# EAGLE board acoustics (EAGLE 9.1.3)
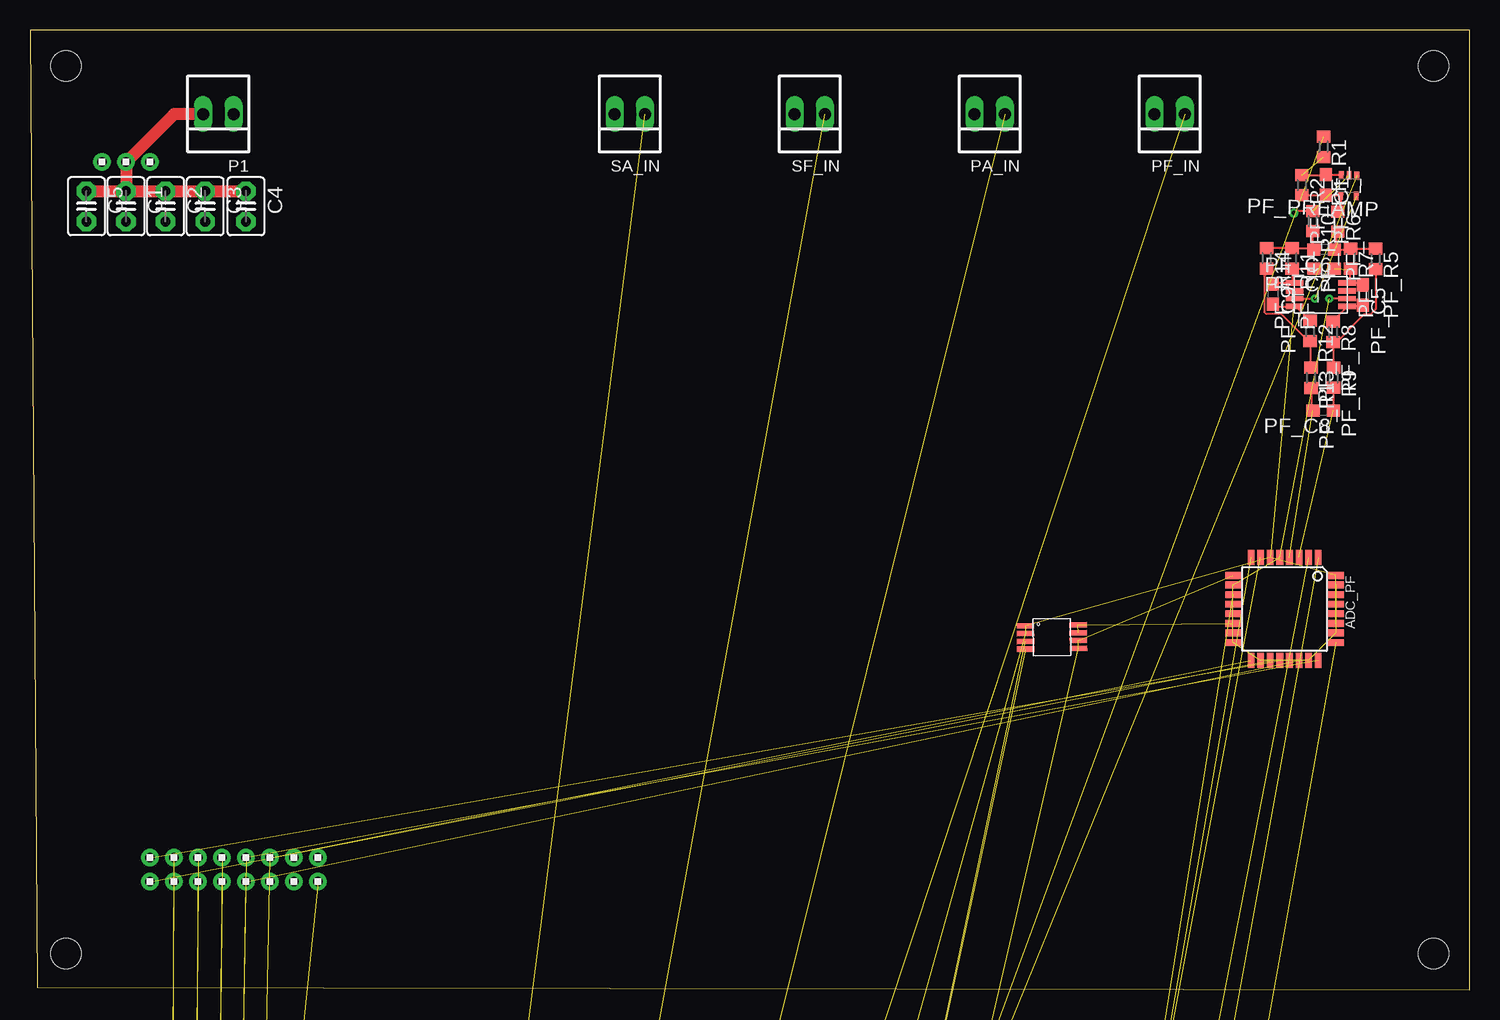
[diagram p0: board, top side]
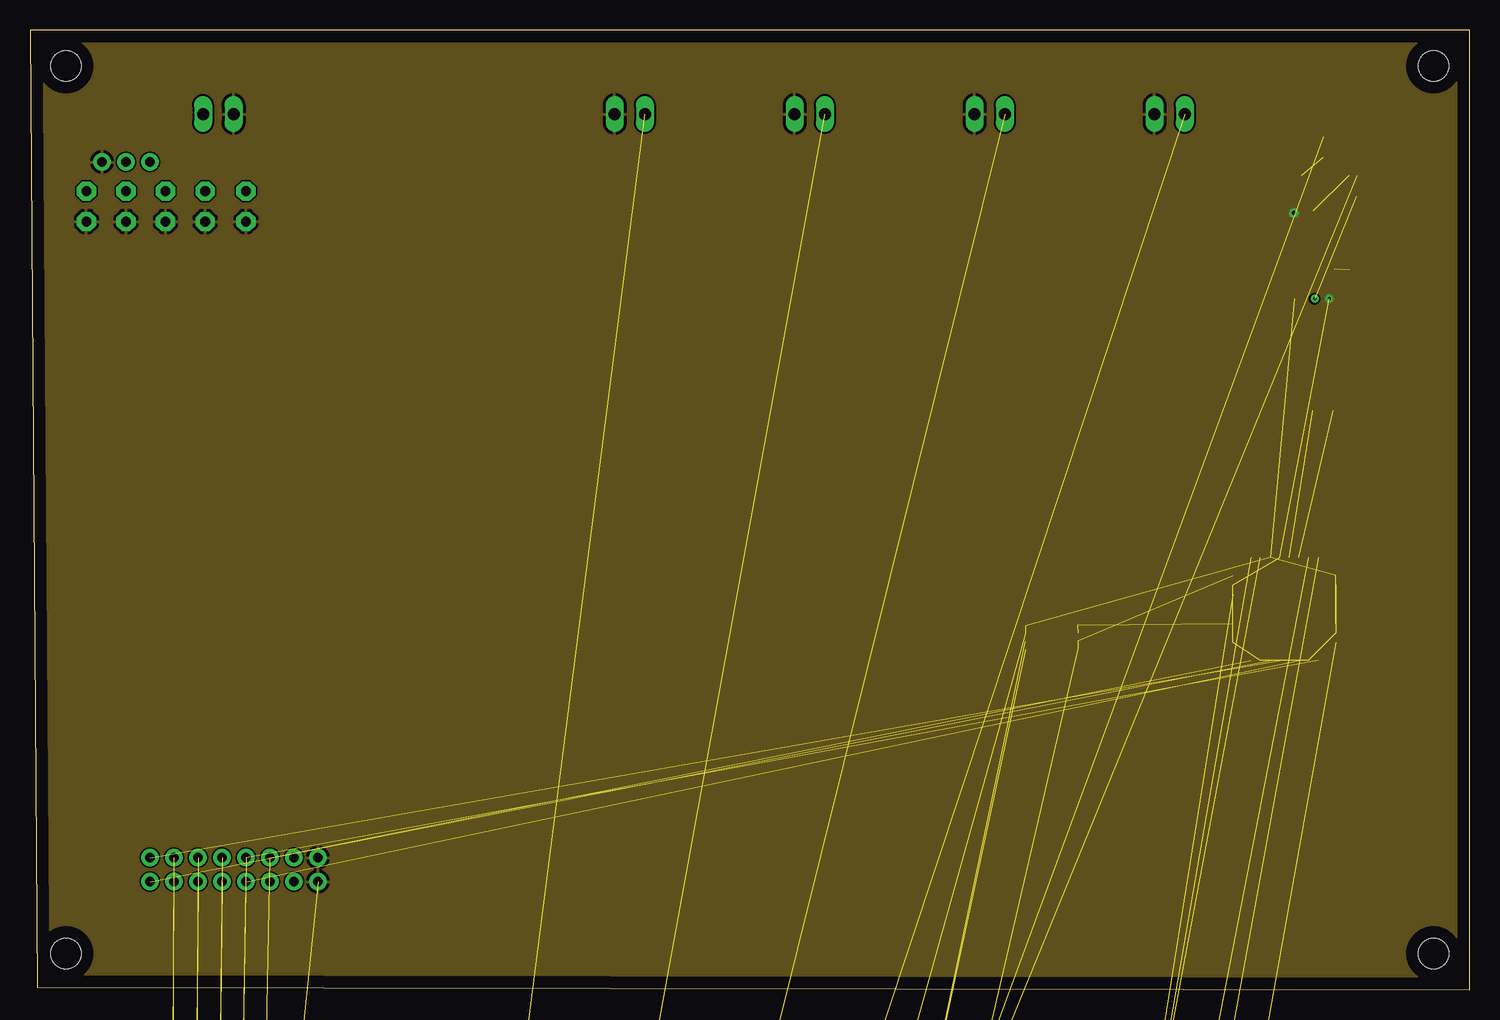
[diagram p1: board, inner layer GND]
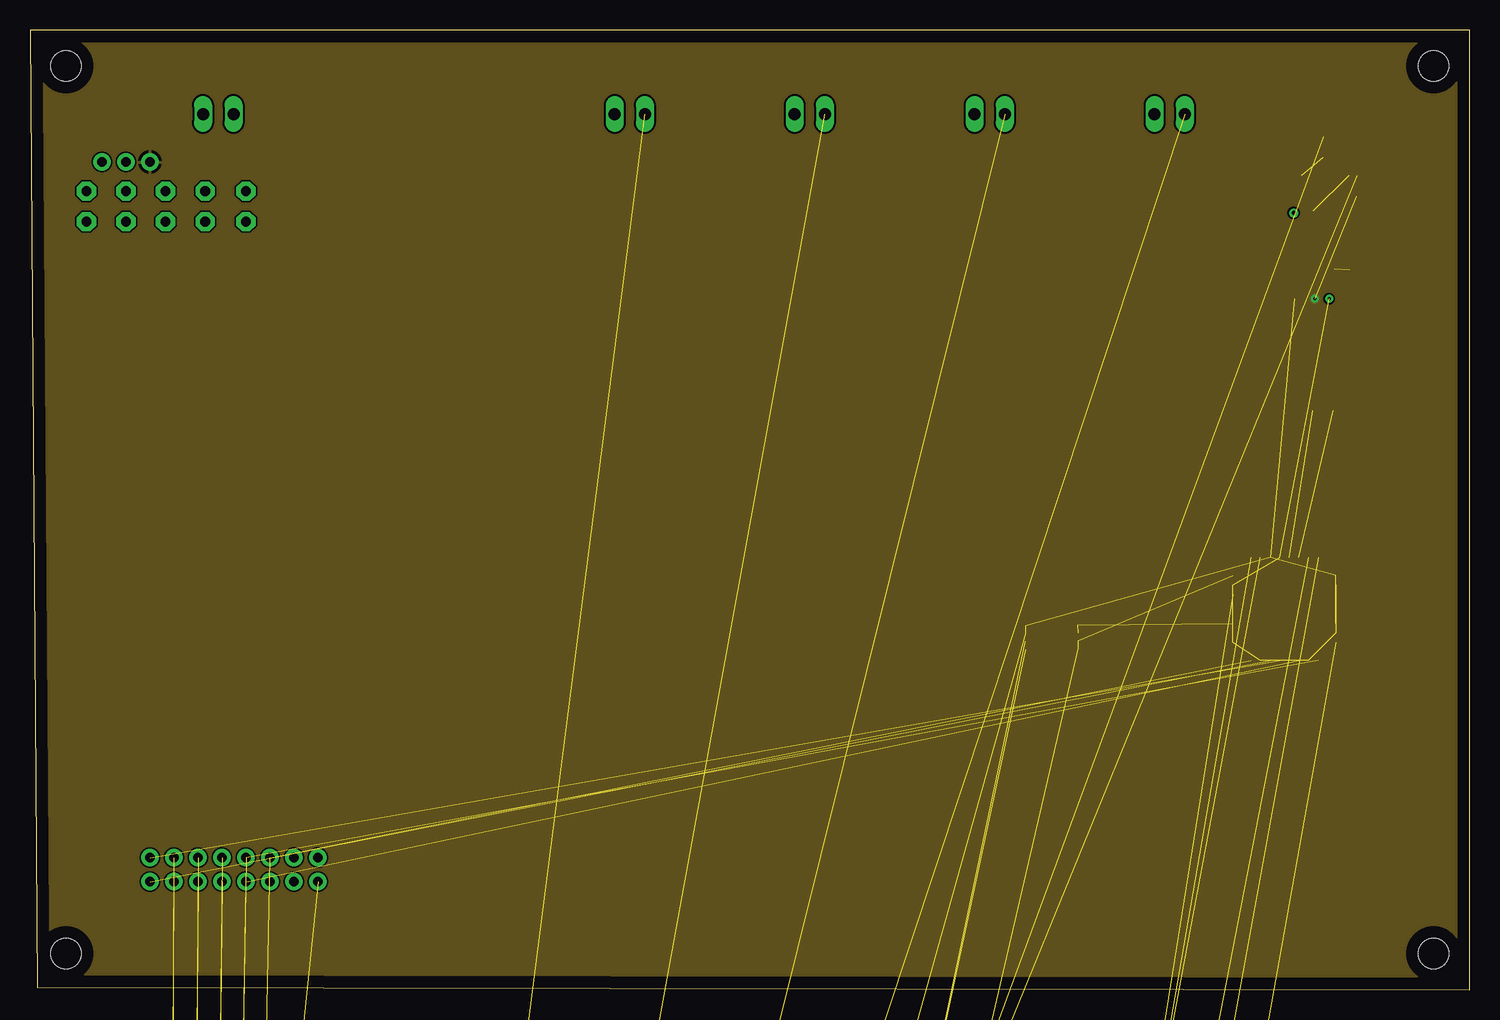
[diagram p2: board, inner layer +3v3]

Size 120 x 80 mm. Coordinates in mm from the lower left corner, seen from the top.
Outline: 0.6,0.2 120,0 120,80 0,80 0.6,0.2
Copper layers (1+2*15+16): Top 0.035mm / dielectric 1.5mm / GND 0.035mm / dielectric 0.15mm / +3v3 0.035mm / dielectric 0.2mm / Bottom 0.035mm
Design rules "default *": minimum track width 6mil, minimum drill 0.35mm, track to track 6mil, track to pad 6mil, pad to pad 6mil, via to via 6mil, smd to smd 0mil, copper to edge 40mil, drill to drill 6mil, minimum pad ring 10mil, minimum via ring 8mil, stop-mask expansion 4mil, vias tented up to drill 0mil, thermal gap 10mil
Holes 2.5 mm at 3,77 117,77 117,3 3,3

## Footprints (pad centres in the part's own frame; a part is rotated, then mirrored left to right if it is on the bottom)
TQFP-32 = smd 1.27 x 0.559: 1 -4.293,2.8; 2 -4.293,2; 3 -4.293,1.2; 4 -4.293,0.4; 5 -4.293,-0.4; 6 -4.293,-1.2; 7 -4.293,-2; 8 -4.293,-2.8; 17 4.293,-2.8; 18 4.293,-2; 19 4.293,-1.2; 20 4.293,-0.4; 21 4.293,0.4; 22 4.293,1.2; 23 4.293,2; 24 4.293,2.8 | smd 0.559 x 1.27: 9 -2.8,-4.293; 10 -2,-4.293; 11 -1.2,-4.293; 12 -0.4,-4.293; 13 0.4,-4.293; 14 1.2,-4.293; 15 2,-4.293; 16 2.8,-4.293; 25 2.8,4.293; 26 2,4.293; 27 1.2,4.293; 28 0.4,4.293; 29 -0.4,4.293; 30 -1.2,4.293; 31 -2,4.293; 32 -2.8,4.293
C2.5-3 = drill 0.813 pad 1.6 octagon: 1 -1.27,0; 2 1.27,0
C0603 = smd 1.1 x 1: 1 -0.85,0; 2 0.85,0
SC70-5 = smd 0.4 x 0.7: 1 -0.65,-0.85; 2 0,-0.85; 3 0.65,-0.85; 4 0.65,0.85; 5 -0.65,0.85
R0603 = smd 1 x 1.1: 1 -0.85,0; 2 0.85,0
REF6025 = smd 0.45 x 1.45: 1 -0.975,-2.2; 2 -0.325,-2.2; 3 0.325,-2.2; 4 0.975,-2.2; 5 0.975,2.2; 6 0.325,2.2; 7 -0.325,2.2; 8 -0.975,2.2
C0603K = smd 1.05 x 1.08: 1 -0.875,0; 2 0.875,0
22-23-2021 = drill 1 long: 1 -1.27,0; 2 1.27,0
VSSOP-8 = smd 0.45 x 1.45: 1 0,0; 2 0.65,0; 3 1.3,0; 4 1.95,0; 5 1.95,4.4; 6 1.3,4.4; 7 0.65,4.4; 8 0,4.4
1X3 = drill 0.8 pad 1.422: 1 -2,0; 2 0,0; 3 2,0
2X8 = drill 0.8 pad 1.422: 1 -7,-1; 2 -7,1; 3 -5,-1; 4 -5,1; 5 -3,-1; 6 -3,1; 7 -1,-1; 8 -1,1; 9 1,-1; 10 1,1; 11 3,-1; 12 3,1; 13 5,-1; 14 5,1; 15 7,-1; 16 7,1

## Placement (x,y rotation side)
ADC_H5  ADS8322  [TQFP-32]  5.08,-516.89 0 top  (outside the outline)
ADC_H7  ADS8322  [TQFP-32]  5.08,-548 0 top  (outside the outline)
ADC_H8  ADS8322  [TQFP-32]  5.08,-579.12 0 top  (outside the outline)
ADC_PF  ADS8322  [TQFP-32]  104.58,31.73 270 top
C1  [C2.5-3]  8,65.3 270 top
C2  [C2.5-3]  11.3,65.3 270 top
C3  [C2.5-3]  14.6,65.3 270 top
C4  [C2.5-3]  18,65.3 270 top
C5  [C2.5-3]  4.7,65.3 270 top
H4_C3  1uf  [C0603]  13.81,-524.51 0 top  (outside the outline)
H4_C4  1uf  [C0603]  1.43,-529.43 0 top  (outside the outline)
H4_C5  1uf  [C0603]  8.41,-529.43 0 top  (outside the outline)
H4_C6  1uf  [C0603]  1.43,-534.35 0 top  (outside the outline)
H4_C12  1uf  [C0603]  13.81,-555.62 0 top  (outside the outline)
H4_C13  1uf  [C0603]  1.43,-560.55 0 top  (outside the outline)
H4_C14  1uf  [C0603]  9.53,-560.55 0 top  (outside the outline)
H4_C15  1uf  [C0603]  1.43,-565.47 0 top  (outside the outline)
H4_C16  1uf  [C0603]  13.81,-586.74 0 top  (outside the outline)
H4_C17  1uf  [C0603]  1.43,-591.66 0 top  (outside the outline)
H4_C18  1uf  [C0603]  9.53,-591.66 0 top  (outside the outline)
H4_C19  1uf  [C0603]  1.43,-596.58 0 top  (outside the outline)
H4_C_POW1  1uf  [C0603]  1.43,-524.51 0 top  (outside the outline)
H4_C_POW3  1uf  [C0603]  1.43,-555.62 0 top  (outside the outline)
H4_C_POW4  1uf  [C0603]  1.43,-586.74 0 top  (outside the outline)
H4_PREAMP4  TLV6741  [SC70-5]  11.43,-297.66 0 top  (outside the outline)
H4_R1  60.4k  [R0603]  8.41,-534.35 0 top  (outside the outline)
H4_R2  10K  [R0603]  1.43,-539.27 0 top  (outside the outline)
H4_R5  60.4k  [R0603]  9.53,-565.47 0 top  (outside the outline)
H4_R8  10K  [R0603]  1.43,-570.39 0 top  (outside the outline)
H4_R9  60.4k  [R0603]  1.43,-601.5 0 top  (outside the outline)
H4_R10  10K  [R0603]  9.53,-596.58 0 top  (outside the outline)
H4_REFGEN2  REF6025  [REF6025]  1.59,-364.01 0 top  (outside the outline)
H4_REFGEN3  REF6025  [REF6025]  1.59,-394.81 0 top  (outside the outline)
H4_REFGEN4  REF6025  [REF6025]  1.59,-425.61 0 top  (outside the outline)
H4ADC_C1  1uf  [C0603K]  8.41,-538.96 0 top  (outside the outline)
H4ADC_C3  1uf  [C0603K]  8.41,-570.07 0 top  (outside the outline)
H4ADC_C4  1uf  [C0603K]  8.41,-601.19 0 top  (outside the outline)
H4RF_C_2  1uf  [C0603]  1.43,-379.41 0 top  (outside the outline)
H4RF_C_3  1uf  [C0603]  1.43,-410.21 0 top  (outside the outline)
H4RF_C_5  1uf  [C0603]  1.43,-441.01 0 top  (outside the outline)
H4RF_C_IN2  10uf  [C0603]  4.76,-363.38 0 top  (outside the outline)
H4RF_C_IN3  10uf  [C0603]  4.76,-394.18 0 top  (outside the outline)
H4RF_C_IN4  10uf  [C0603]  1.43,-431.17 0 top  (outside the outline)
H4RF_C_O5  0.1uf  [C0603]  1.43,-369.57 0 top  (outside the outline)
H4RF_C_O6  47uf  [C0603]  1.43,-374.49 0 top  (outside the outline)
H4RF_C_O7  0.1uf  [C0603]  1.43,-400.37 0 top  (outside the outline)
H4RF_C_O8  47uf  [C0603]  1.43,-405.29 0 top  (outside the outline)
H4RF_C_O9  0.1uf  [C0603]  1.43,-436.09 0 top  (outside the outline)
H4RF_C_O10  47uf  [C0603]  4.76,-424.97 0 top  (outside the outline)
H4RF_R_4  121k  [R0603]  1.43,-384.33 0 top  (outside the outline)
H4RF_R_5  47m  [R0603]  1.43,-389.25 0 top  (outside the outline)
H4RF_R_6  121k  [R0603]  1.43,-415.13 0 top  (outside the outline)
H4RF_R_7  47m  [R0603]  1.43,-420.05 0 top  (outside the outline)
H4RF_R_8  121k  [R0603]  1.43,-445.93 0 top  (outside the outline)
H4RF_R_9  47m  [R0603]  1.43,-450.85 0 top  (outside the outline)
P1  22-23-2021  [22-23-2021]  15.7,73 180 top
PA_C1  1pF  [C0603]  1.43,-241.78 0 top  (outside the outline)
PA_C2  5nF  [C0603]  1.43,-251.62 0 top  (outside the outline)
PA_C3  10mF  [C0603]  1.43,-236.85 0 top  (outside the outline)
PA_C4  100nF  [C0603]  13.49,-251.62 0 top  (outside the outline)
PA_IN  22-23-2021  [22-23-2021]  80,73 180 top
PA_PREAMP2  TLV6741  [SC70-5]  11.43,-226.54 0 top  (outside the outline)
PA_R1  10k  [R0603]  14.13,-246.7 0 top  (outside the outline)
PA_R2  1 M  [R0603]  1.43,-246.7 0 top  (outside the outline)
PA_R3  100k  [R0603]  1.43,-256.54 0 top  (outside the outline)
PA_R4  100k  [R0603]  10.79,-256.54 0 top  (outside the outline)
PF_15  1uf  [C0603]  8.41,-503.24 0 top  (outside the outline)
PF_C1  1pF  [C0603]  108.03,67.08 270 top
PF_C2  5nF  [C0603]  1.43,-216.06 0 top  (outside the outline)
PF_C3  10mF  [C0603]  1.43,-201.29 0 top  (outside the outline)
PF_C4  100nF  [C0603]  13.49,-216.06 0 top  (outside the outline)
PF_C5  270pF  [C0603]  111.11,57.9 270 top
PF_C6  470 pF  [C0603]  107.88,61.7 180 top
PF_C7  1nF  [C0603]  107.87,60.1 180 top
PF_C8  22nF  [C0603]  107.81,48.28 180 top
PF_C9  270pF  [C0603]  103.61,57.99 270 top
PF_C10  10uf  [C0603]  4.76,-332.58 0 top  (outside the outline)
PF_C11  1uf  [C0603]  1.43,-348.62 0 top  (outside the outline)
PF_C12  47uf  [C0603]  1.43,-343.69 0 top  (outside the outline)
PF_C13  0.1uf  [C0603]  1.43,-338.77 0 top  (outside the outline)
PF_C14  1uf  [C0603]  1.43,-503.24 0 top  (outside the outline)
PF_C15  270pF  [C0603]  5.1,-606.4 0 top  (outside the outline)
PF_C16  1uf  [C0603K]  15.4,-507.84 0 top  (outside the outline)
PF_C17  1uf  [C0603]  15.4,-503.24 0 top  (outside the outline)
PF_C18  1uf  [C0603]  13.81,-498.32 0 top  (outside the outline)
PF_C19  1uf  [C0603]  1.43,-498.32 0 top  (outside the outline)
PF_C20  270pF  [C0603]  13.1,-606.4 0 top  (outside the outline)
PF_C21  1nF  [C0603]  1.5,-612.7 0 top  (outside the outline)
PF_C22  470 pF  [C0603]  9.5,-612.7 0 top  (outside the outline)
PF_C23  22nF  [C0603]  17.5,-612.7 0 top  (outside the outline)
PF_C24  270pF  [C0603]  5.1,-637.2 0 top  (outside the outline)
PF_C25  270pF  [C0603]  13.1,-637.2 0 top  (outside the outline)
PF_C26  1nF  [C0603]  1.5,-643.5 0 top  (outside the outline)
PF_C27  470 pF  [C0603]  9.5,-643.5 0 top  (outside the outline)
PF_C28  22nF  [C0603]  17.5,-643.5 0 top  (outside the outline)
PF_C29  270pF  [C0603]  5.1,-668 0 top  (outside the outline)
PF_C30  270pF  [C0603]  13.1,-668 0 top  (outside the outline)
PF_C31  1nF  [C0603]  1.5,-674.3 0 top  (outside the outline)
PF_C32  470 pF  [C0603]  9.5,-674.3 0 top  (outside the outline)
PF_C33  22nF  [C0603]  17.5,-674.3 0 top  (outside the outline)
PF_DA  THS4551  [VSSOP-8]  105.4,58.9 270 top
PF_DA1  THS4551  [VSSOP-8]  1,-609.2 0 top  (outside the outline)
PF_DA2  THS4551  [VSSOP-8]  1,-640 0 top  (outside the outline)
PF_DA3  THS4551  [VSSOP-8]  1,-670.8 0 top  (outside the outline)
PF_IN  22-23-2021  [22-23-2021]  95,73 180 top
PF_PREAMP  TLV6741  [SC70-5]  109.93,67.02 178.4 top
PF_R1  10k  [R0603]  107.83,70.26 270 top
PF_R2  1 M  [R0603]  106.03,67.06 270 top
PF_R3  100k  [R0603]  1.43,-220.98 0 top  (outside the outline)
PF_R4  100k  [R0603]  10.79,-220.98 0 top  (outside the outline)
PF_R5  1.2k  [R0603]  112.17,60.91 270 top
PF_R6  1.2K  [R0603]  109.03,64.02 270 top
PF_R7  330  [R0603]  110.08,60.94 270 top
PF_R8  5  [R0603]  108.63,54.83 270 top
PF_R9  10  [R0603]  108.66,51.02 270 top
PF_R10  1.2k  [R0603]  106.93,64.06 270 top
PF_R11  330  [R0603]  105.21,60.96 270 top
PF_R12  5  [R0603]  106.72,54.9 270 top
PF_R13  10  [R0603]  106.79,51 270 top
PF_R14  1.2k  [R0603]  103.09,60.97 270 top
PF_R15  121k  [R0603]  1.43,-353.54 0 top  (outside the outline)
PF_R16  47m  [R0603]  1.43,-358.46 0 top  (outside the outline)
PF_R17  60.4k  [R0603]  1.43,-508.16 0 top  (outside the outline)
PF_R18  10K  [R0603]  8.41,-508.16 0 top  (outside the outline)
PF_R19  330  [R0603]  1.5,-617.6 0 top  (outside the outline)
PF_R20  1.2K  [R0603]  9.5,-617.6 0 top  (outside the outline)
PF_R21  1.2k  [R0603]  17.5,-617.6 0 top  (outside the outline)
PF_R22  330  [R0603]  1.5,-622.5 0 top  (outside the outline)
PF_R23  5  [R0603]  9.5,-622.5 0 top  (outside the outline)
PF_R24  5  [R0603]  17.5,-622.5 0 top  (outside the outline)
PF_R25  1.2k  [R0603]  1.5,-627.4 0 top  (outside the outline)
PF_R26  1.2k  [R0603]  9.5,-627.4 0 top  (outside the outline)
PF_R27  10  [R0603]  17.5,-627.4 0 top  (outside the outline)
PF_R28  10  [R0603]  1.5,-632.3 0 top  (outside the outline)
PF_R29  330  [R0603]  1.5,-648.4 0 top  (outside the outline)
PF_R30  1.2K  [R0603]  9.5,-648.4 0 top  (outside the outline)
PF_R31  1.2k  [R0603]  17.5,-648.4 0 top  (outside the outline)
PF_R32  330  [R0603]  1.5,-653.3 0 top  (outside the outline)
PF_R33  5  [R0603]  9.5,-653.3 0 top  (outside the outline)
PF_R34  5  [R0603]  17.5,-653.3 0 top  (outside the outline)
PF_R35  1.2k  [R0603]  1.5,-658.2 0 top  (outside the outline)
PF_R36  1.2k  [R0603]  9.5,-658.2 0 top  (outside the outline)
PF_R37  10  [R0603]  17.5,-658.2 0 top  (outside the outline)
PF_R38  10  [R0603]  1.5,-663.1 0 top  (outside the outline)
PF_R39  330  [R0603]  1.5,-679.2 0 top  (outside the outline)
PF_R40  1.2K  [R0603]  9.5,-679.2 0 top  (outside the outline)
PF_R41  1.2k  [R0603]  17.5,-679.2 0 top  (outside the outline)
PF_R42  330  [R0603]  1.5,-684.1 0 top  (outside the outline)
PF_R43  5  [R0603]  9.5,-684.1 0 top  (outside the outline)
PF_R44  5  [R0603]  17.5,-684.1 0 top  (outside the outline)
PF_R45  1.2k  [R0603]  1.5,-689 0 top  (outside the outline)
PF_R46  1.2k  [R0603]  9.5,-689 0 top  (outside the outline)
PF_R47  10  [R0603]  17.5,-689 0 top  (outside the outline)
PF_R48  10  [R0603]  1.5,-693.9 0 top  (outside the outline)
PF_REFGEN  REF6025  [REF6025]  85.19,29.38 270.9 top
SA_C1  1pF  [C0603]  1.43,-312.9 0 top  (outside the outline)
SA_C2  5nF  [C0603]  1.43,-322.74 0 top  (outside the outline)
SA_C3  10mF  [C0603]  1.43,-307.98 0 top  (outside the outline)
SA_C4  100nF  [C0603]  13.49,-322.74 0 top  (outside the outline)
SA_IN  22-23-2021  [22-23-2021]  50,73 180 top
SA_R1  10k  [R0603]  14.13,-317.82 0 top  (outside the outline)
SA_R2  1 M  [R0603]  1.43,-317.82 0 top  (outside the outline)
SA_R3  100k  [R0603]  1.43,-327.66 0 top  (outside the outline)
SA_R4  100k  [R0603]  10.79,-327.66 0 top  (outside the outline)
SF_C1  1pF  [C0603]  1.43,-277.34 0 top  (outside the outline)
SF_C2  5nF  [C0603]  1.43,-287.18 0 top  (outside the outline)
SF_C3  10mF  [C0603]  1.43,-272.42 0 top  (outside the outline)
SF_C4  100nF  [C0603]  13.49,-287.18 0 top  (outside the outline)
SF_IN  22-23-2021  [22-23-2021]  65,73 180 top
SF_PREAMP3  TLV6741  [SC70-5]  11.43,-262.1 0 top  (outside the outline)
SF_R1  10k  [R0603]  14.13,-282.26 0 top  (outside the outline)
SF_R2  1 M  [R0603]  1.43,-282.26 0 top  (outside the outline)
SF_R3  100k  [R0603]  1.43,-292.1 0 top  (outside the outline)
SF_R4  100k  [R0603]  10.79,-292.1 0 top  (outside the outline)
U$1  1X3  [1X3]  8,69 180 top
U$2  2X8  [2X8]  17,10 0 top

## Library data of the parts
ADC_H5 ADC_H7 ADC_H8 ADC_PF = ti-ads8322
C1-C5 = capacitor-wima
H4_C3-H4_C6 H4_C12-H4_C19 H4_C_POW1 H4_C_POW3 H4_C_POW4 H4_R1 H4_R2 H4_R5 H4_R8-H4_R10 H4ADC_C1 H4ADC_C3 H4ADC_C4 H4RF_C_2 H4RF_C_3 H4RF_C_5 H4RF_C_IN2-H4RF_C_IN4 H4RF_C_O5-H4RF_C_O10 PF_15 PF_C10-PF_C14 PF_C16-PF_C19 PF_R17 PF_R18 = rcl
H4_PREAMP4 PA_PREAMP2 PF_PREAMP SF_PREAMP3 = lio
H4_REFGEN2-H4_REFGEN4 PF_REFGEN = REF6025
H4RF_R_4-H4RF_R_9 PA_C1-PA_C4 PA_R1-PA_R4 PF_C1-PF_C9 PF_C15 PF_C20-PF_C33 PF_R1-PF_R16 PF_R19-PF_R48 SA_C1-SA_C4 SA_R1-SA_R4 SF_C1-SF_C4 SF_R1-SF_R4 = resistor
P1 PA_IN PF_IN SA_IN SF_IN = con-molex; MF: MOLEX; MPN: 22-23-2021; OC_FARNELL: 1462926; OC_NEWARK: 25C3832
PF_DA PF_DA1-PF_DA3 = THS4551
U$1 U$2 = headers(2mm)

## Nets
+3V3: ADC_H5.6 ADC_H5.27 ADC_H5.28 ADC_H5.29 ADC_H5.32 ADC_H7.6 ADC_H7.27 ADC_H7.28 ADC_H7.29 ADC_H7.32 ADC_H8.6 ADC_H8.27 ADC_H8.28 ADC_H8.29 ADC_H8.32 ADC_PF.6 ADC_PF.27 ADC_PF.28 ADC_PF.29 ADC_PF.32 H4_C_POW1.1 H4_C_POW3.1 H4_C_POW4.1 H4_PREAMP4.5 H4_REFGEN2.1 H4_REFGEN2.2 H4_REFGEN3.1 H4_REFGEN3.2 H4_REFGEN4.1 H4_REFGEN4.2 H4ADC_C1.1 H4ADC_C3.1 H4ADC_C4.1 H4RF_C_IN2.2 H4RF_C_IN3.2 H4RF_C_IN4.2 PA_C4.2 PA_PREAMP2.5 PA_R4.2 PF_C4.2 PF_C10.2 PF_C16.1 PF_C19.1 PF_DA1.3 PF_DA2.3 PF_DA3.3 PF_DA.3 PF_PREAMP.5 PF_R4.2 PF_REFGEN.1 PF_REFGEN.2 SA_C4.2 SA_R4.2 SF_C4.2 SF_PREAMP3.5 SF_R4.2 U$1.1
+5V: C1.1 C2.1 C3.1 C4.1 C5.1 P1.2 U$1.2
AMPED_PA: PA_C1.2 PA_PREAMP2.4 PA_R2.2 PF_R20.1
AMPED_PF: PF_C1.2 PF_PREAMP.4 PF_R2.2 PF_R6.1
AMPED_SA: H4_PREAMP4.4 PF_R40.1 SA_C1.2 SA_R2.2
AMPED_SF: PF_R30.1 SF_C1.2 SF_PREAMP3.4 SF_R2.2
CLK: ADC_H5.24 ADC_H7.24 ADC_H8.24 ADC_PF.24 U$2.10
DIFF_N_PA: ADC_H5.3 PF_C23.1 PF_R27.2
DIFF_N_PF: ADC_PF.3 PF_C8.1 PF_R9.2
DIFF_N_SA: ADC_H8.3 PF_C33.1 PF_R47.2
DIFF_N_SF: ADC_H7.3 PF_C28.1 PF_R37.2
DIFF_P_PA: ADC_H5.4 PF_C23.2 PF_R28.2
DIFF_P_PF: ADC_PF.4 PF_C8.2 PF_R13.2
DIFF_P_SA: ADC_H8.4 PF_C33.2 PF_R48.2
DIFF_P_SF: ADC_H7.4 PF_C28.2 PF_R38.2
DOUT_PA: ADC_H5.20 U$2.4
DOUT_PF: ADC_PF.20 U$2.2
DOUT_SA: ADC_H8.20 U$2.8
DOUT_SF: ADC_H7.20 U$2.6
DRDY_PA: ADC_H5.19 U$2.3
DRDY_PF: ADC_PF.19 U$2.1
DRDY_SA: ADC_H8.19 U$2.7
DRDY_SF: ADC_H7.19 U$2.5
GND: ADC_H5.5 ADC_H5.10 ADC_H5.12 ADC_H5.13 ADC_H5.14 ADC_H5.15 ADC_H5.16 ADC_H5.18 ADC_H5.21 ADC_H5.23 ADC_H5.26 ADC_H5.30 ADC_H5.31 ADC_H7.5 ADC_H7.10 ADC_H7.12 ADC_H7.13 ADC_H7.14 ADC_H7.15 ADC_H7.16 ADC_H7.18 ADC_H7.21 ADC_H7.23 ADC_H7.26 ADC_H7.30 ADC_H7.31 ADC_H8.5 ADC_H8.10 ADC_H8.12 ADC_H8.13 ADC_H8.14 ADC_H8.15 ADC_H8.16 ADC_H8.18 ADC_H8.21 ADC_H8.23 ADC_H8.26 ADC_H8.30 ADC_H8.31 ADC_PF.5 ADC_PF.10 ADC_PF.12 ADC_PF.13 ADC_PF.14 ADC_PF.15 ADC_PF.16 ADC_PF.18 ADC_PF.21 ADC_PF.23 ADC_PF.26 ADC_PF.30 ADC_PF.31 C1.2 C2.2 C3.2 C4.2 C5.2 H4_C3.1 H4_C4.1 H4_C5.2 H4_C6.1 H4_C12.1 H4_C13.1 H4_C14.2 H4_C15.1 H4_C16.1 H4_C17.1 H4_C18.2 H4_C19.1 H4_C_POW1.2 H4_C_POW3.2 H4_C_POW4.2 H4_PREAMP4.2 H4_R1.2 H4_R2.2 H4_R5.2 H4_R8.2 H4_R9.2 H4_R10.2 H4_REFGEN2.7 H4_REFGEN2.8 H4_REFGEN3.7 H4_REFGEN3.8 H4_REFGEN4.7 H4_REFGEN4.8 H4ADC_C1.2 H4ADC_C3.2 H4ADC_C4.2 H4RF_C_2.1 H4RF_C_3.1 H4RF_C_5.1 H4RF_C_IN2.1 H4RF_C_IN3.1 H4RF_C_IN4.1 H4RF_C_O5.1 H4RF_C_O7.1 H4RF_C_O9.1 H4RF_R_4.1 H4RF_R_5.1 H4RF_R_6.1 H4RF_R_7.1 H4RF_R_8.1 H4RF_R_9.1 P1.1 PA_C3.2 PA_C4.1 PA_IN.2 PA_PREAMP2.2 PA_R3.2 PF_15.1 PF_C3.2 PF_C4.1 PF_C10.1 PF_C11.1 PF_C13.1 PF_C14.1 PF_C16.2 PF_C17.2 PF_C18.1 PF_C19.2 PF_DA1.6 PF_DA2.6 PF_DA3.6 PF_DA.6 PF_IN.2 PF_PREAMP.2 PF_R3.2 PF_R10.1 PF_R15.1 PF_R16.1 PF_R17.2 PF_R18.2 PF_R21.1 PF_R31.1 PF_R41.1 PF_REFGEN.7 PF_REFGEN.8 SA_C3.2 SA_C4.1 SA_IN.2 SA_R3.2 SF_C3.2 SF_C4.1 SF_IN.2 SF_PREAMP3.2 SF_R3.2 U$1.3 U$2.15 U$2.16
N$1: PF_C15.2 PF_DA1.5 PF_R23.1
N$2: PF_C15.1 PF_C21.1 PF_DA1.8 PF_R19.2
N$3: PF_C20.1 PF_C21.2 PF_DA1.1 PF_R22.2
N$4: PF_C22.1 PF_R19.1 PF_R20.2 PF_R25.1
N$5: PF_C22.2 PF_R21.2 PF_R22.1 PF_R26.1
N$6: PF_C20.2 PF_DA1.4 PF_R24.1
N$7: PF_R23.2 PF_R25.2 PF_R27.1
N$8: PF_R24.2 PF_R26.2 PF_R28.1
N$9: PF_C24.2 PF_DA2.5 PF_R33.1
N$10: PF_C24.1 PF_C26.1 PF_DA2.8 PF_R29.2
N$11: PF_C25.1 PF_C26.2 PF_DA2.1 PF_R32.2
N$12: PF_C27.1 PF_R29.1 PF_R30.2 PF_R35.1
N$13: PF_C27.2 PF_R31.2 PF_R32.1 PF_R36.1
N$14: PF_C25.2 PF_DA2.4 PF_R34.1
N$15: PF_R33.2 PF_R35.2 PF_R37.1
N$16: PF_R34.2 PF_R36.2 PF_R38.1
N$17: PF_C29.2 PF_DA3.5 PF_R43.1
N$18: PF_C29.1 PF_C31.1 PF_DA3.8 PF_R39.2
N$19: PF_C30.1 PF_C31.2 PF_DA3.1 PF_R42.2
N$20: PF_C32.1 PF_R39.1 PF_R40.2 PF_R45.1
N$21: PF_C32.2 PF_R41.2 PF_R42.1 PF_R46.1
N$22: PF_C30.2 PF_DA3.4 PF_R44.1
N$23: PF_R43.2 PF_R45.2 PF_R47.1
N$24: PF_R44.2 PF_R46.2 PF_R48.1
N$88: PF_R12.2 PF_R13.1 PF_R14.2
N$97: PF_C5.2 PF_DA.5 PF_R8.1
N$98: PF_C5.1 PF_C7.1 PF_DA.8 PF_R7.2
N$99: PF_C7.2 PF_C9.1 PF_DA.1 PF_R11.2
N$100: PF_C6.1 PF_R5.1 PF_R6.2 PF_R7.1
N$101: PF_C6.2 PF_R10.2 PF_R11.1 PF_R14.1
N$102: PF_C9.2 PF_DA.4 PF_R12.1
N$103: PF_C11.2 PF_REFGEN.4
N$104: PF_R15.2 PF_REFGEN.3
N$105: PF_C12.1 PF_R16.2
N$109: PF_R5.2 PF_R8.2 PF_R9.1
N$110: H4_REFGEN2.4 H4RF_C_2.2
N$116: H4_REFGEN2.3 H4RF_R_4.2
N$117: H4RF_C_O6.1 H4RF_R_5.2
N$118: H4_REFGEN3.4 H4RF_C_3.2
N$121: H4_REFGEN3.3 H4RF_R_6.2
N$124: H4RF_C_O8.1 H4RF_R_7.2
N$129: H4_REFGEN4.4 H4RF_C_5.2
N$130: H4_REFGEN4.3 H4RF_R_8.2
N$131: H4RF_C_O10.1 H4RF_R_9.2
N$132: ADC_PF.2 PF_C14.2
N$133: PF_C2.2 PF_R1.1
N$134: PF_C1.1 PF_PREAMP.3 PF_R1.2 PF_R2.1
N$135: PF_C3.1 PF_PREAMP.1 PF_R3.1 PF_R4.1
N$136: ADC_H5.1 H4_C4.2
N$137: PA_C2.2 PA_R1.1
N$138: PA_C1.1 PA_PREAMP2.3 PA_R1.2 PA_R2.1
N$139: PA_C3.1 PA_PREAMP2.1 PA_R3.1 PA_R4.1
N$140: ADC_H5.8 H4_R2.1
N$141: SF_C2.2 SF_R1.1
N$142: SF_C1.1 SF_PREAMP3.3 SF_R1.2 SF_R2.1
N$143: SF_C3.1 SF_PREAMP3.1 SF_R3.1 SF_R4.1
N$144: ADC_H5.7 H4_R1.1
N$145: SA_C2.2 SA_R1.1
N$146: H4_PREAMP4.3 SA_C1.1 SA_R1.2 SA_R2.1
N$147: H4_PREAMP4.1 SA_C3.1 SA_R3.1 SA_R4.1
N$148: ADC_H5.11 H4_C5.1
N$149: ADC_H5.25 H4_C6.2
N$150: ADC_PF.1 PF_15.2
N$151: ADC_H5.2 H4_C3.2
N$152: ADC_PF.8 PF_R18.1
N$153: ADC_PF.7 PF_R17.1
N$154: ADC_PF.11 PF_C17.1
N$155: ADC_PF.25 PF_C18.2
N$156: ADC_H7.1 H4_C13.2
N$157: ADC_H7.8 H4_R8.1
N$158: ADC_H7.7 H4_R5.1
N$159: ADC_H7.11 H4_C14.1
N$160: ADC_H7.25 H4_C15.2
N$161: ADC_H7.2 H4_C12.2
N$162: ADC_H8.1 H4_C17.2
N$163: ADC_H8.8 H4_R10.1
N$164: ADC_H8.7 H4_R9.1
N$165: ADC_H8.11 H4_C18.1
N$166: ADC_H8.25 H4_C19.2
N$167: ADC_H8.2 H4_C16.2
RAW_PA: PA_C2.1 PA_IN.1
RAW_PF: PF_C2.1 PF_IN.1
RAW_SA: SA_C2.1 SA_IN.1
RAW_SF: SF_C2.1 SF_IN.1
REF_PA: ADC_H5.9 H4_REFGEN2.5 H4_REFGEN2.6 H4RF_C_O5.2 H4RF_C_O6.2
REF_PF: ADC_PF.9 PF_C12.2 PF_C13.2 PF_REFGEN.5 PF_REFGEN.6
REF_SA: ADC_H8.9 H4_REFGEN4.5 H4_REFGEN4.6 H4RF_C_O9.2 H4RF_C_O10.2
REF_SF: ADC_H7.9 H4_REFGEN3.5 H4_REFGEN3.6 H4RF_C_O7.2 H4RF_C_O8.2
SCLK: ADC_H5.22 ADC_H7.22 ADC_H8.22 ADC_PF.22 U$2.9
START: ADC_H5.17 ADC_H7.17 ADC_H8.17 ADC_PF.17 U$2.12

## Tracks (layer width: path | path; a pad name or v marks a point on that pad's centre or on a via)
+3V3  (via drill 0.25)  (55 unrouted)
  Top 0.152: PF_DA.3 v107.1,57.6
  pour +3v3: 0,80 120,80 120,0 0,0
+5V
  Top 1.016: P1.2 12,73 U$1.2 C1.1 | C1.1 C2.1 C3.1 C4.1 | C5.1 C1.1
AMPED_PA  (3 unrouted)
AMPED_PF
  Top 0.152: PF_R6.1 109.26,65.1 PF_PREAMP.4 109.22,66.23 PF_C1.2 108.01,66.21 PF_R2.2
AMPED_SA  (3 unrouted)
AMPED_SF  (3 unrouted)
CLK  (4 unrouted)
DIFF_N_PA  (2 unrouted)
DIFF_N_PF  (1 unrouted)
  Top 0.152: PF_R9.2 PF_C8.1
DIFF_N_SA  (2 unrouted)
DIFF_N_SF  (2 unrouted)
DIFF_P_PA  (2 unrouted)
DIFF_P_PF  (1 unrouted)
  Top 0.152: PF_R13.2 106.79,48.44 PF_C8.2
DIFF_P_SA  (2 unrouted)
DIFF_P_SF  (2 unrouted)
DOUT_PA  (1 unrouted)
DOUT_PF  (1 unrouted)
DOUT_SA  (1 unrouted)
DOUT_SF  (1 unrouted)
DRDY_PA  (1 unrouted)
DRDY_PF  (1 unrouted)
DRDY_SA  (1 unrouted)
DRDY_SF  (1 unrouted)
GND  (via drill 0.25, 0.35)  (134 unrouted)
  Top 0.152: PF_DA.6 v108.3,57.6 | 106.84,65 PF_R10.1 105.6,64.91 105.39,64.7 v105.34,64.74
  pour GND: 0,80 120,80 120,0 0,0
N$1  (2 unrouted)
N$2  (3 unrouted)
N$3  (3 unrouted)
N$4  (3 unrouted)
N$5  (3 unrouted)
N$6  (2 unrouted)
N$7  (2 unrouted)
N$8  (2 unrouted)
N$9  (2 unrouted)
N$10  (3 unrouted)
N$11  (3 unrouted)
N$12  (3 unrouted)
N$13  (3 unrouted)
N$14  (2 unrouted)
N$15  (2 unrouted)
N$16  (2 unrouted)
N$17  (2 unrouted)
N$18  (3 unrouted)
N$19  (3 unrouted)
N$20  (3 unrouted)
N$21  (3 unrouted)
N$22  (2 unrouted)
N$23  (2 unrouted)
N$24  (2 unrouted)
N$88
  Top 0.152: PF_R12.2 106.72,53.9 | 106.72,53.9 106.72,51.93 PF_R13.1 | PF_R14.2 103.09,59.7 102.88,59.48 102.88,56.49 103.01,56.36 104.26,56.36 106.72,53.9
N$97
  Top 0.152: PF_R8.1 108.63,55.78 PF_DA.5 111.02,56.95 PF_C5.2
N$98  (1 unrouted)
  Top 0.152: PF_C5.1 110.96,58.9 110,58.9 | 110,58.9 PF_DA.8 | PF_R7.2 110,60.01 110,58.9
N$99
  Top 0.152: PF_C7.2 107,60.11 PF_R11.2 105.21,59.09 PF_DA.1 103.67,58.9 PF_C9.1
N$100
  Top 0.152: PF_C6.1 108.9,61.7 | 108.9,61.7 109.99,61.7 PF_R7.1 112.14,61.79 PF_R5.1 | PF_R6.2 108.9,63.04 108.9,61.7
N$101
  Top 0.152: 106.92,61.81 PF_R11.1 PF_R14.1 | 106.92,61.81 PF_C6.2 | PF_R10.2 106.92,63.2 106.92,61.81
N$102
  Top 0.152: PF_R12.1 105.52,56.95 PF_DA.4 103.8,56.95 PF_C9.2
N$103  (1 unrouted)
N$104  (1 unrouted)
N$105  (1 unrouted)
N$109
  Top 0.152: PF_R8.2 108.63,53.7 | 108.63,53.7 108.63,51.91 PF_R9.1 | 108.63,53.7 111.2,56.27 111.71,56.27 112.17,56.73 PF_R5.2
N$110  (1 unrouted)
N$116  (1 unrouted)
N$117  (1 unrouted)
N$118  (1 unrouted)
N$121  (1 unrouted)
N$124  (1 unrouted)
N$129  (1 unrouted)
N$130  (1 unrouted)
N$131  (1 unrouted)
N$132  (1 unrouted)
N$133  (1 unrouted)
N$134  (1 unrouted)
  Top 0.152: PF_PREAMP.3 109.26,67.93 PF_C1.1 108.01,67.91 PF_R2.1
N$135  (3 unrouted)
N$136  (1 unrouted)
N$137  (1 unrouted)
N$138  (3 unrouted)
N$139  (3 unrouted)
N$140  (1 unrouted)
N$141  (1 unrouted)
N$142  (3 unrouted)
N$143  (3 unrouted)
N$144  (1 unrouted)
N$145  (1 unrouted)
N$146  (3 unrouted)
N$147  (3 unrouted)
N$148  (1 unrouted)
N$149  (1 unrouted)
N$150  (1 unrouted)
N$151  (1 unrouted)
N$152  (1 unrouted)
N$153  (1 unrouted)
N$154  (1 unrouted)
N$155  (1 unrouted)
N$156  (1 unrouted)
N$157  (1 unrouted)
N$158  (1 unrouted)
N$159  (1 unrouted)
N$160  (1 unrouted)
N$161  (1 unrouted)
N$162  (1 unrouted)
N$163  (1 unrouted)
N$164  (1 unrouted)
N$165  (1 unrouted)
N$166  (1 unrouted)
N$167  (1 unrouted)
RAW_PA  (1 unrouted)
RAW_PF  (1 unrouted)
RAW_SA  (1 unrouted)
RAW_SF  (1 unrouted)
REF_PA  (4 unrouted)
REF_PF  (4 unrouted)
REF_SA  (4 unrouted)
REF_SF  (4 unrouted)
SCLK  (4 unrouted)
START  (4 unrouted)